# Altium PCB ESS_BOW_PCB.PcbDoc
Units mm, origin at the board's own origin, x right, y up, seen from the top; angles counter-clockwise.
Board outline 48.83 x 32.65 mm, 4 copper layers (Top Layer, GND, PWR, Bottom Layer), stack 0.603 mm thick; 47 components, 35 nets, 285 pads, 0 vias.
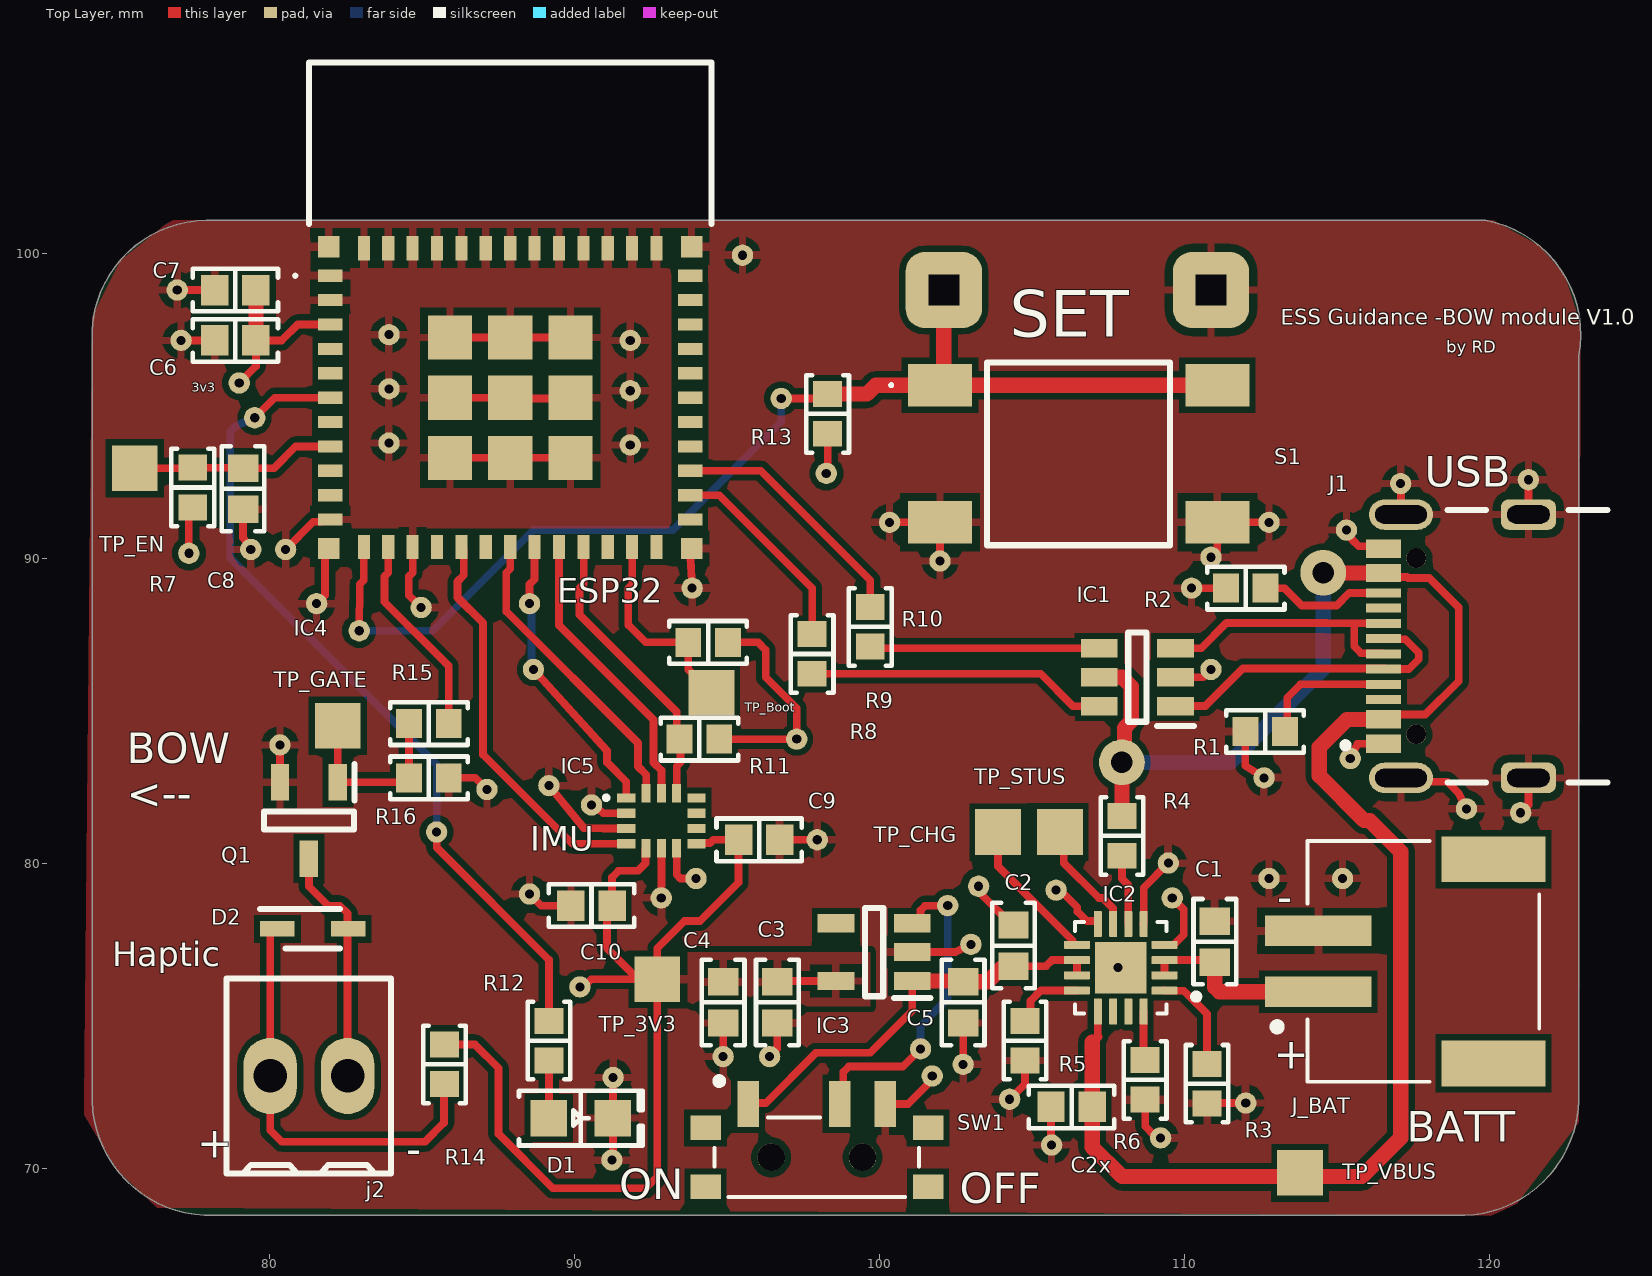
[diagram p0: Top Layer view]
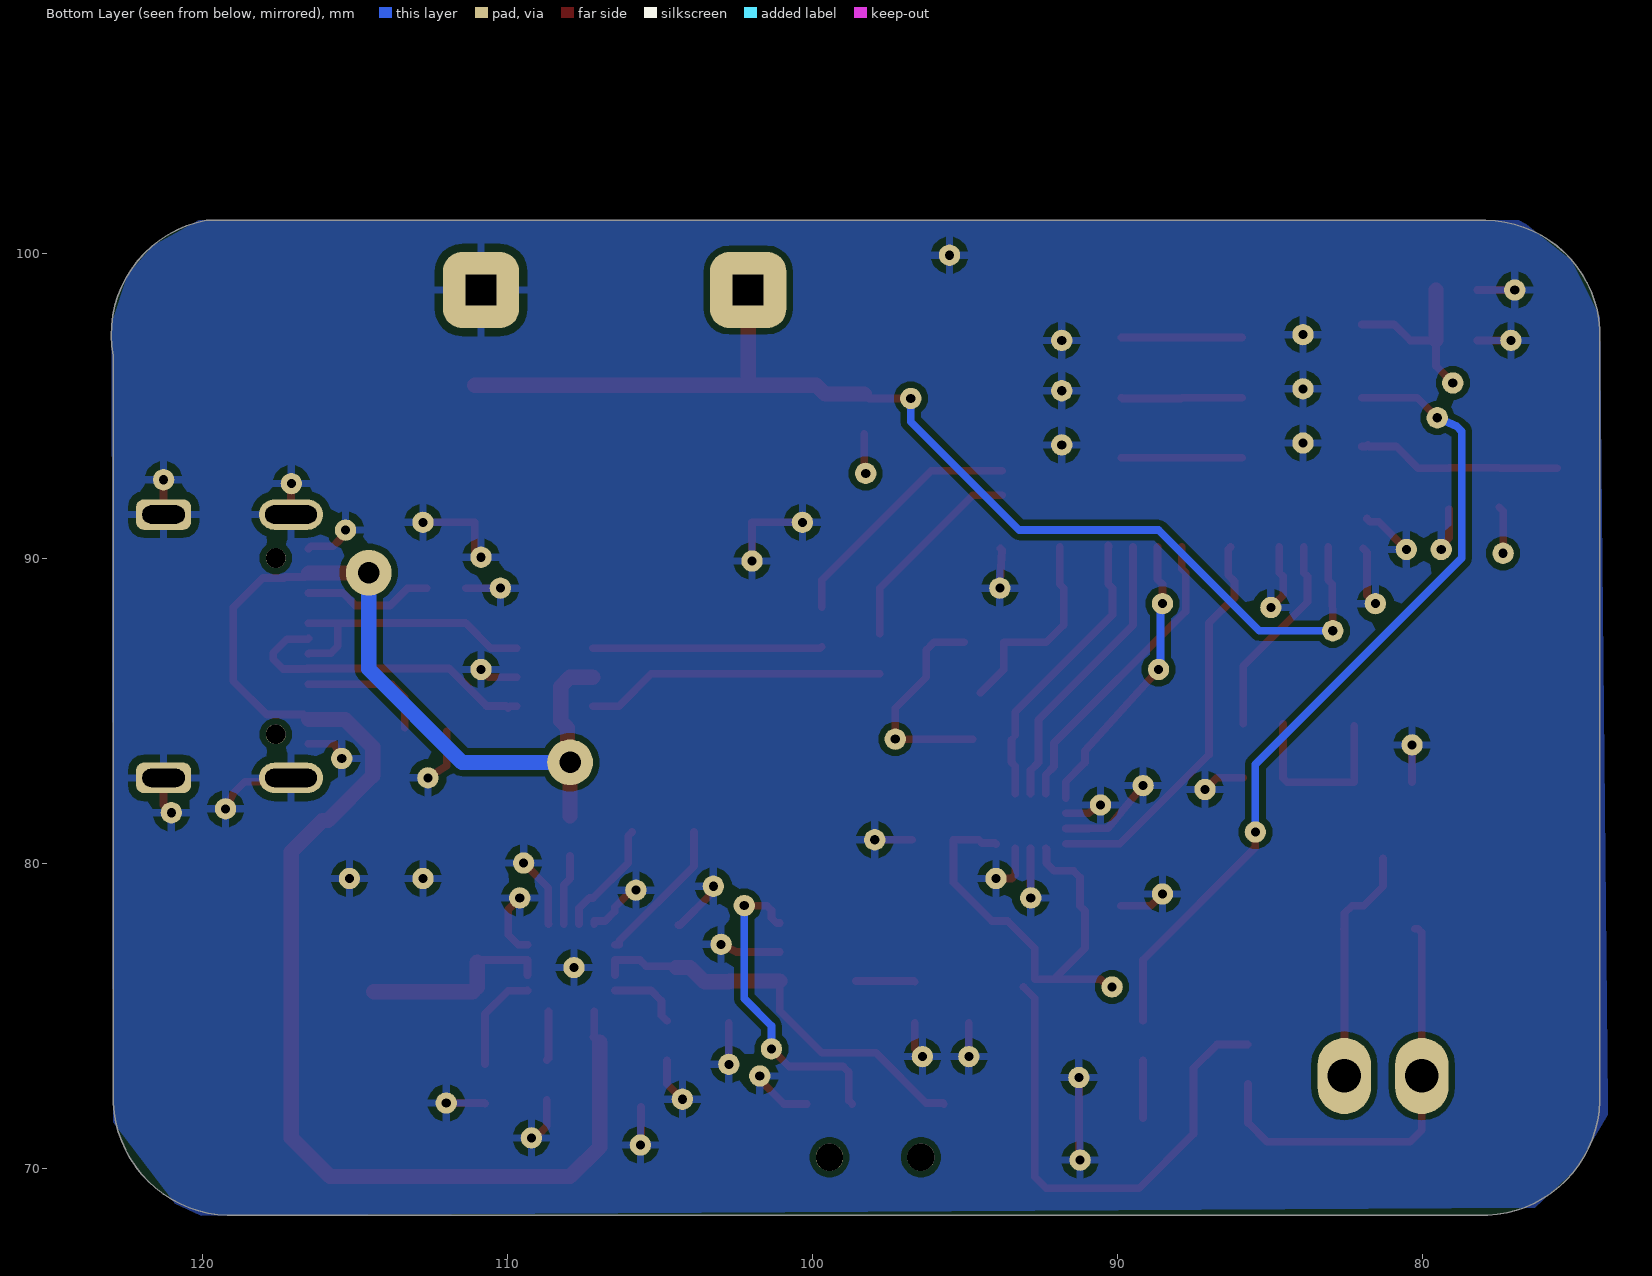
[diagram p1: Bottom Layer view, seen from below]
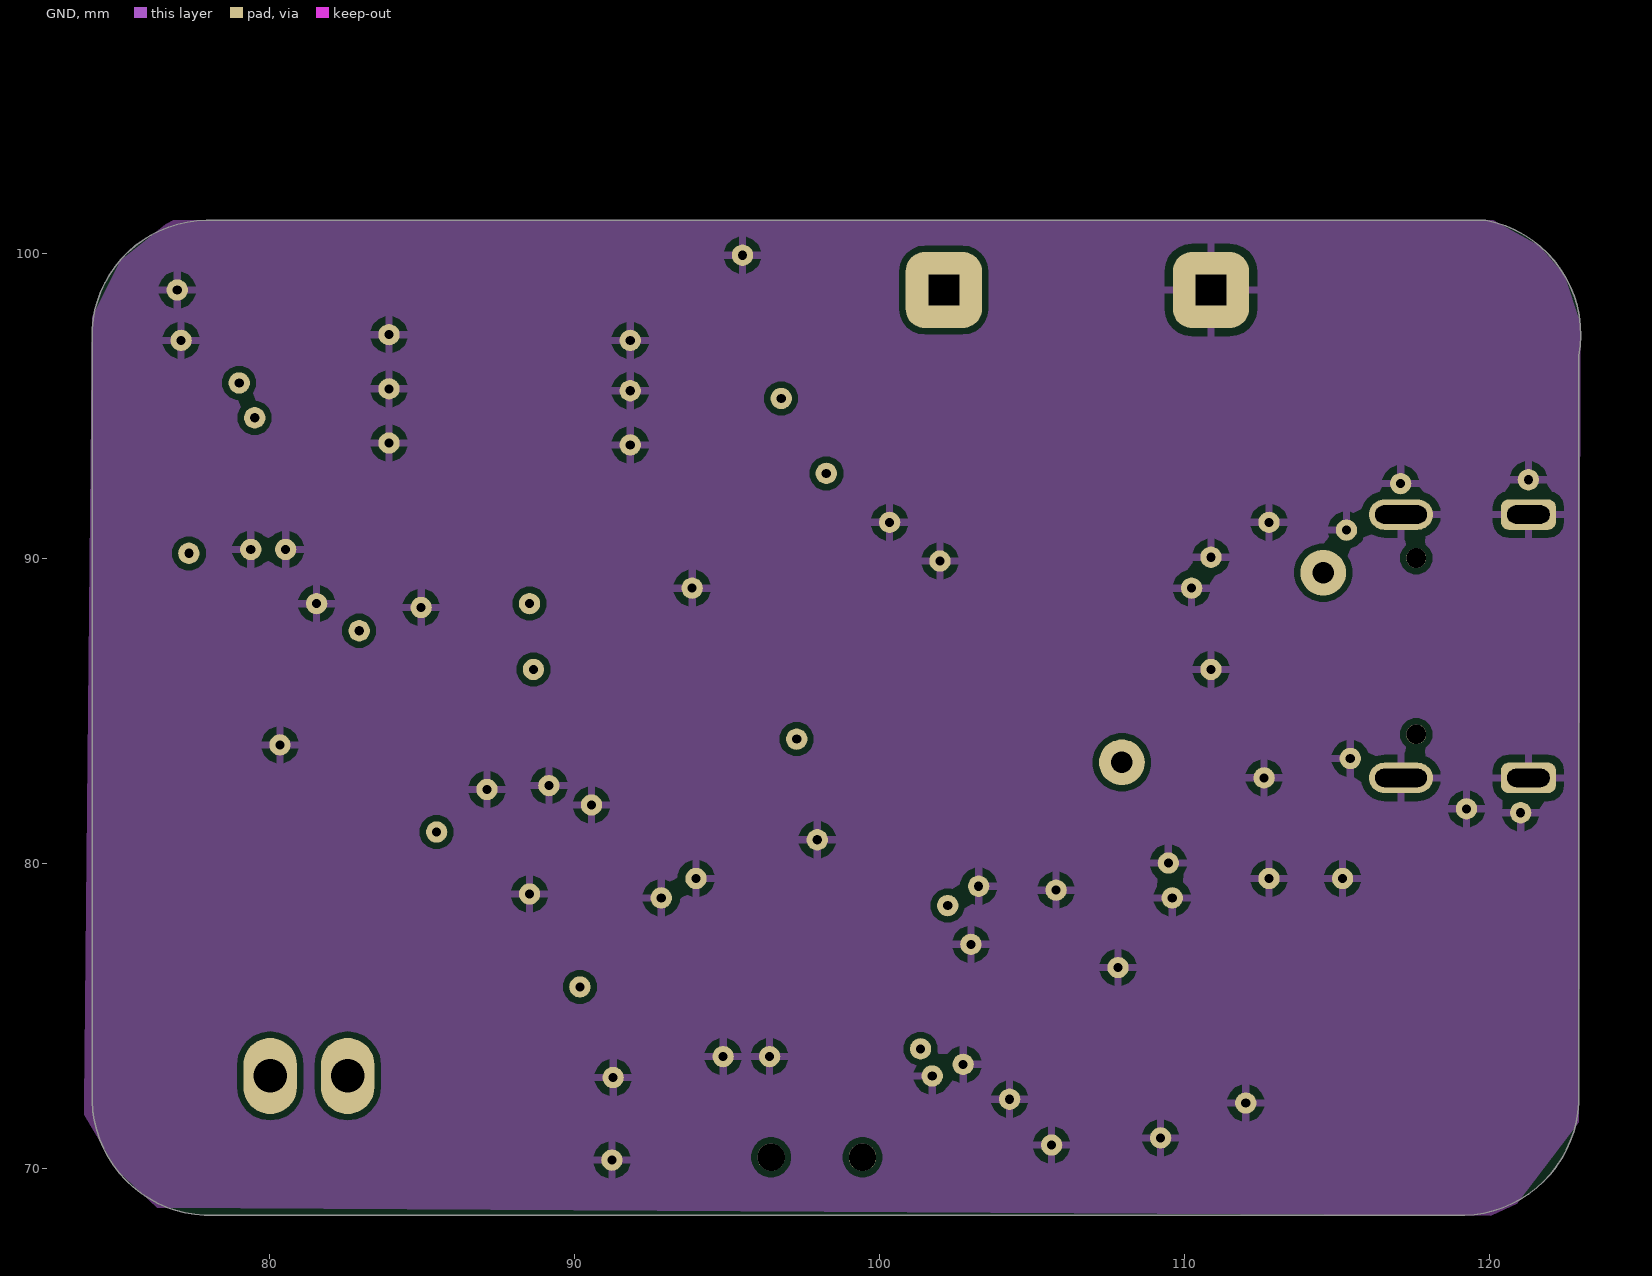
[diagram p2: GND]
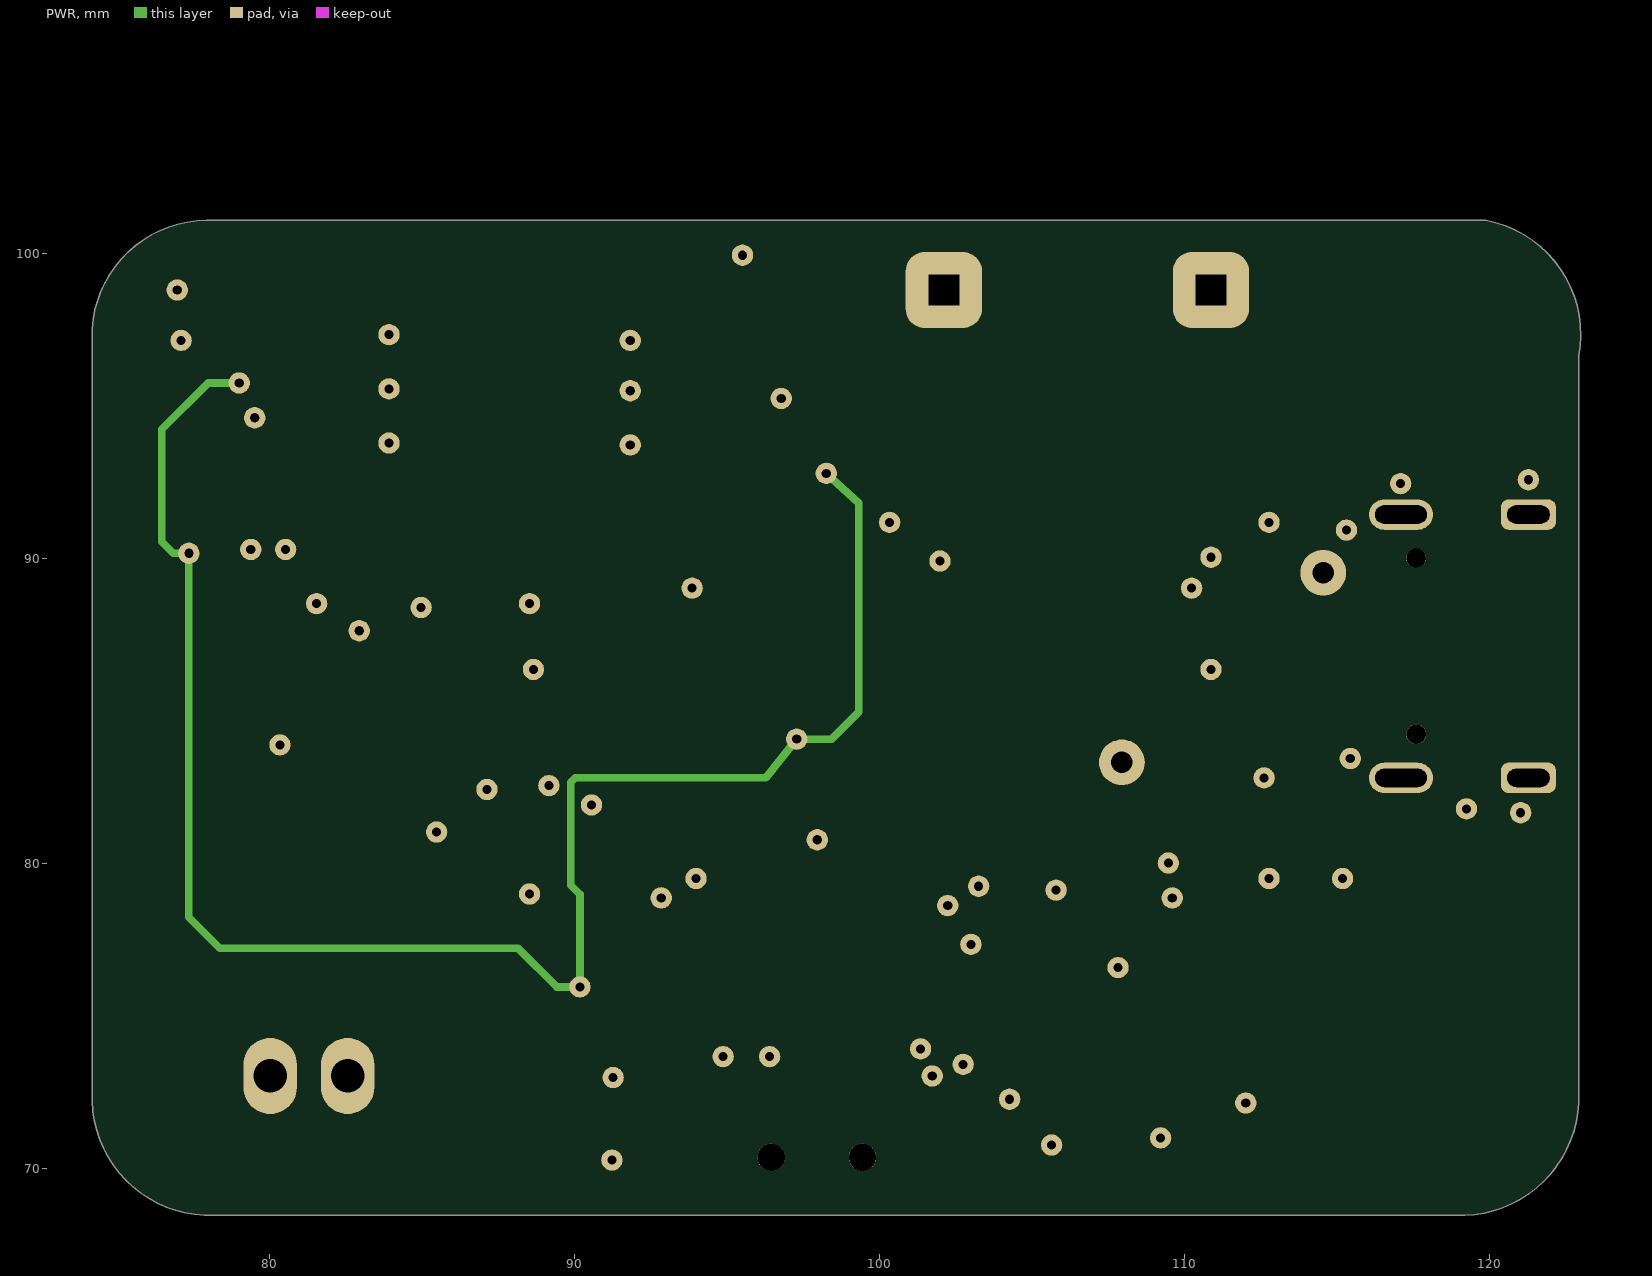
[diagram p3: PWR]
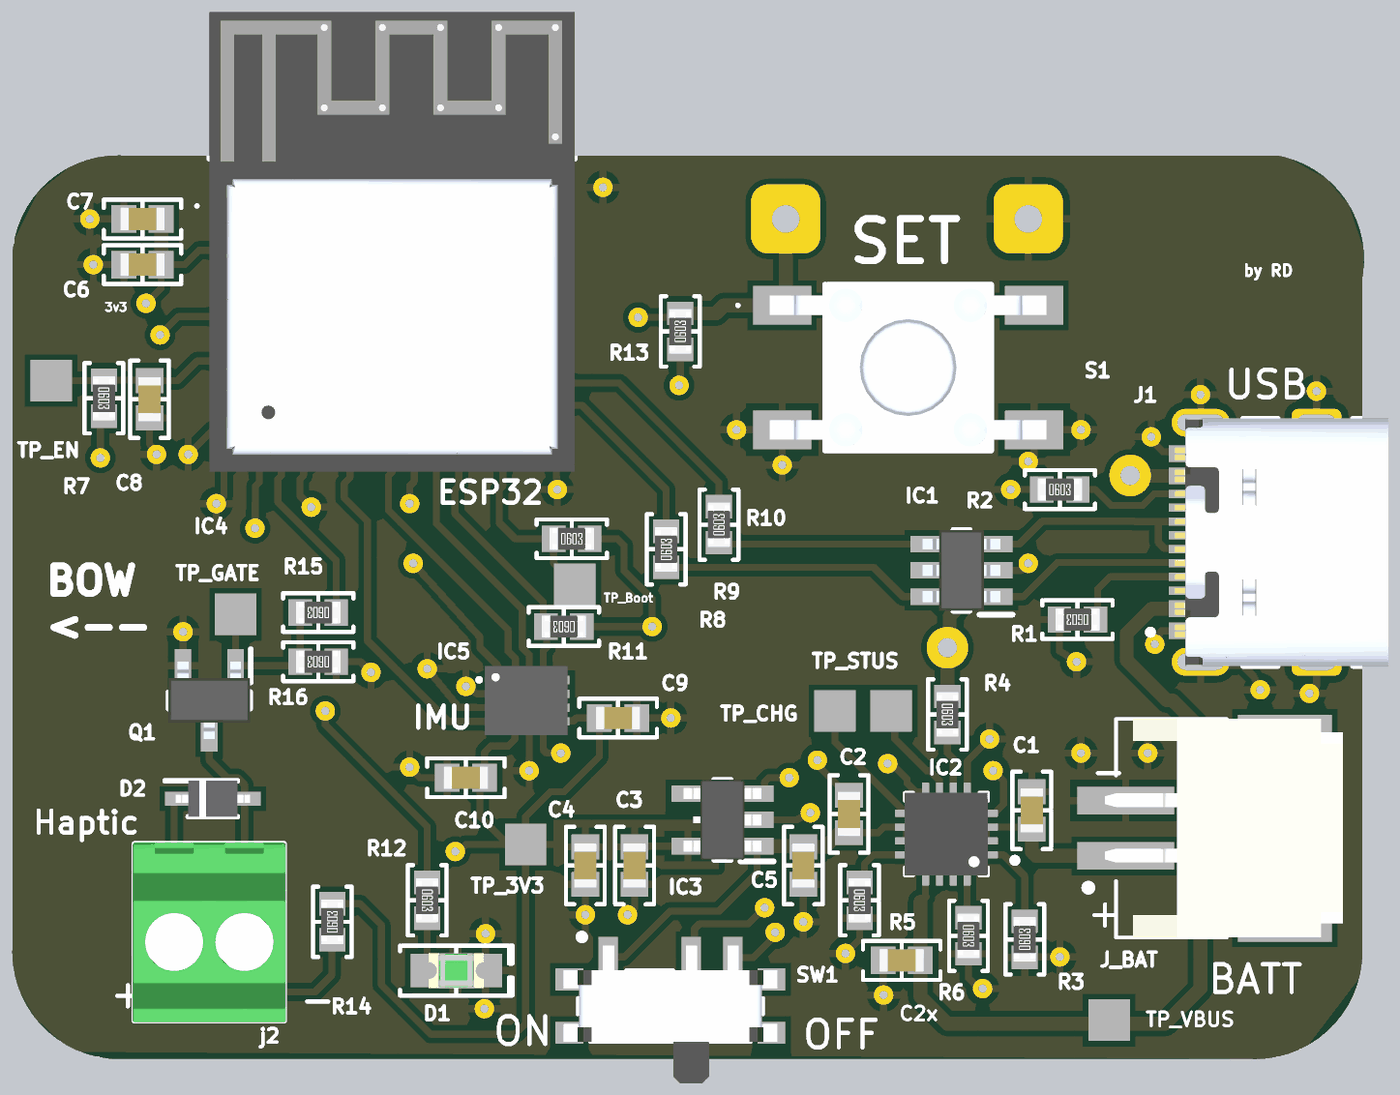
[diagram p4: 3D render of the assembled board from above, using the file's embedded part models]

## Layer stack, top to bottom
Top Solder: solder mask 0.0102, Solder Resist, Dk 3.5
Top Layer: signal copper 0.0356
Dielectric 2: prepreg 0.0711, PP-006, Dk 4.1
GND: signal copper 0.035
Dielectric 1: dielectric 0.32, FR-4, Dk 4.8
PWR: signal copper 0.035
Dielectric 3: prepreg 0.0711, PP-006, Dk 4.1
Bottom Layer: signal copper 0.0356
Bottom Solder: solder mask 0.0102, Solder Resist, Dk 3.5

## Board outline
77.851,68.453 cw(c78.041,72.326) 74.168,72.517 74.168,97.536 cw(c77.978,97.282) 78.232,101.092 119.888,101.092 cw(c119.189,97.346) 122.936,96.647 122.936,72.136 cw(c119.062,72.326) 118.872,68.453

## Design rules (kind name [scope] priority, off if disabled: settings)
Clearance Clearance_1 [All] p1: gap=0.2 ignorepadtopadclearanceinfootprint=TRUE
Clearance [All] p2: gap=0.2 ignorepadtopadclearanceinfootprint=TRUE
MinimumSolderMaskSliver [All] p1: minsoldermaskwidth=0.04
PolygonConnect [All] p1: connectstyle=Relief reliefconductorwidth=0.254 reliefentries=4 polygonreliefangle="90 Angle" airgapwidth=0.254
RoutingVias [All] p1: holewidth=0.3 width=0.7 viastyle="Through Hole" minholewidth=0.2 minwidth=0.4 maxholewidth=0.7 maxwidth=1.27
SilkToSilkClearance [All] p1: silktosilkclearance=0.05
SilkToSolderMaskClearance [IsPad] p1: minsilkscreentomaskgap=0.04 clearancetoexposedcopper=TRUE
SolderMaskExpansion [All] p1: expansion=0 istentingtop=FALSE
SupplyNets "Schematic Supply Nets" [InNet('GND')] p1: voltage=0.000
Width [All] p1: maxlimit=0.5 minlimit=0.254 preferedwidth=0.254
27 further rules are at their usual default settings.

## Classes and differential pairs
component class Bow_ESS_Schematic: C1 C2 C3 C4 C5 C6 C7 C8 C9 C10 D2 IC1 IC2 IC3 IC5 J1 j2 J_BAT Q1 R1 R2 R3 R4 R5 R6 R7 R8 R9 R10 R11 R12 R13 R14 R15 R16 S1 SW1 TP_3V3 TP_Boot TP_CHG TP_EN TP_GATE TP_STUS

## Components (designator, comment, footprint, x,y, rotation, side; value= is the part's Value field where it differs from the comment)
C1 "10 µF" "CAP 0603_1608" 110.998,77.43 r270 top
C2 "10 µF" "CAP 0603_1608" 104.394,77.303 r270 top
C2x "Comment" "CAP 0603_1608" 106.299,72.009 r180 top
C3 "0.1 µF" "CAP 0603_1608" 96.647,75.438 r90 top
C4 "10 µF" "CAP 0603_1608" 94.869,75.438 r90 top
C5 "4.7 µF" "CAP 0603_1608" 102.743,75.438 r270 top
C6 "0.1 µF" "CAP 0603_1608" 78.867,97.155 r0 top
C7 "10 µF" "CAP 0603_1608" 78.867,98.806 r0 top
C8 "1 µF" "CAP 0603_1608" 79.121,92.289 r90 top
C9 "0.1 µF" "CAP 0603_1608" 96.052,80.772 r180 top
C10 "0.1 µF" "CAP 0603_1608" 90.551,78.613 r180 top
D1 "Green" "LED 0805_2012 GREEN" 90.204,71.643 r0 top
D2 "BAT54WS-E3-08" SOD2713X115N 81.407,77.851 r0 top
IC1 "USBLC6-2SC6" SOT95P280X145-6N 108.458,86.106 r180 top
IC2 "BQ24074RGTR_1" QFN50P300X300X100-17N 107.912,76.577 r180 top
IC3 "TLV75533PDBVR" SOT95P280X145-5N 99.822,77.089 r180 top
IC4 "ESP32-C3-MINI-1-N4X" ESP32C3MINI1N4X 87.884,97.976 r0 top
IC5 "LSM6DSOXTR" LGA-14_1 92.844,81.395 r0 top
J1 "USB4105-GF-A-060" GCT_USB4105-GF-A-060 121.285,87.122 r90 top
j2 "282834-2" "TE 282834-2" 81.28,73.025 r180 top
J_BAT "S2B-PH-SM4-TB(LF)(SN)_1" JST_S2B-PH-SM4-TB(LF)(SN) 114.392,76.787 r90 top
Q1 "AO3400A" SOT95P280X125-3N 81.28,81.407 r270 top
R1 "5.1 kOhms" "RES 0603_1608" 112.649,84.328 r180 top
R2 "5.1 kOhms" "RES 0603_1608" 112.014,89.027 r0 top
R3 "10 kOhms" "RES 0603_1608" 110.744,72.771 r90 top
R4 "0 Ohms" "RES 0603_1608" 107.95,80.899 r270 top
R5 "3.3 kOhms" "RES 0603_1608" 104.775,74.183 r270 top
R6 "5.9 kOhms" "RES 0603_1608" 108.712,72.898 r270 top
R7 "10 kOhms" "RES 0603_1608" 77.47,92.329 r270 top
R8 "10 kOhms" "RES 0603_1608" 94.376,87.249 r0 top
R9 "22 Ohms" "RES 0603_1608" 97.79,86.868 r90 top
R10 "22 Ohms" "RES 0603_1608" 99.695,87.757 r90 top
R11 "10 kOhms" "RES 0603_1608" 94.092,84.074 r180 top
R12 "1 kOhms" "RES 0603_1608" 89.154,74.183 r270 top
R13 "10 kOhms" "RES 0603_1608" 98.298,94.742 r90 top
R14 "3.9 Ohms" "RES 0603_1608" 85.725,73.406 r90 top
R15 "100 Ohms" "RES 0603_1608" 85.217,84.582 r180 top
R16 "100 kOhms" "RES 0603_1608" 85.217,82.804 r180 top
S1 "TS04-66-43-BK-100-SMT" TS046643BK100SMT 106.531,93.436 r0 top
SW1 "PCM12SMTR" SW_PCM12SMTR 97.941,70.358 r0 top
TP_3V3 "" Test_Pad 93.599,76.327 r90 top
TP_Boot "" Test_Pad 95.377,85.725 r90 top
TP_CHG "" Test_Pad 104.775,81.153 r90 top
TP_EN "Test Point" Test_Pad 76.454,93.091 r90 top
TP_GATE "" Test_Pad 83.119,84.643 r90 top
TP_STUS "" Test_Pad 106.807,81.153 r90 top
TP_VBUS "Comment" Test_Pad 113.919,68.961 r0 top

## Footprints (in the part's own frame and the unit in brackets; to place one, negate y for a bottom-side part, rotate by r counter-clockwise, add the part's x,y. Pads: shape width x height; smd on the part's side, far side on the other; paste and mask are expansions set on the pad)
"CAP 0603_1608" [mm] "Chip Capacitor, 2-Leads, Body 1.60x0.80mm, IPC Medium Density"
  rect 0.9x1 smd: 1(-0.675,0) 2(0.675,0)
  silkscreen extent -1.4,-0.7 1.4,0.7, body extent -0.8,-0.41 0.8,0.41, height 0.82
ESP32C3MINI1N4X [mm]
  rect 0.8x0.4 smd: 1(-5.9,1.3) 2(-5.9,0.5) 3(-5.9,-0.3) 4(-5.9,-1.1) 5(-5.9,-1.9) 6(-5.9,-2.7) 7(-5.9,-3.5) 8(-5.9,-4.3) 9(-5.9,-5.1) 10(-5.9,-5.9) 11(-5.9,-6.7) 25(5.9,-6.7) 26(5.9,-5.9) 27(5.9,-5.1) 28(5.9,-4.3) 29(5.9,-3.5) 30(5.9,-2.7) 31(5.9,-1.9) 32(5.9,-1.1) 33(5.9,-0.3) 34(5.9,0.5) 35(5.9,1.3)
  rect 0.4x0.8 smd: 12(-4.8,-7.6) 13(-4,-7.6) 14(-3.2,-7.6) 15(-2.4,-7.6) 16(-1.6,-7.6) 17(-0.8,-7.6) 18(0,-7.6) 19(0.8,-7.6) 20(1.6,-7.6) 21(2.4,-7.6) 22(3.2,-7.6) 23(4,-7.6) 24(4.8,-7.6) 36(4.8,2.2) 37(4,2.2) 38(3.2,2.2) 39(2.4,2.2) 40(1.6,2.2) 41(0.8,2.2) 42(0,2.2) 43(-0.8,2.2) 44(-1.6,2.2) 45(-2.4,2.2) 46(-3.2,2.2) 47(-4,2.2) 48(-4.8,2.2)
  rect 1.45x1.45 smd: 49(0,-2.7) 54(-1.975,-0.725) 55(-1.975,-2.7) 56(-1.975,-4.675) 57(0,-4.675) 58(1.975,-4.675) 59(1.975,-2.7) 60(1.975,-0.725) 61(0,-0.725)
  rect 0.7x0.7 smd: 50(5.95,2.25) 51(5.95,-7.65) 52(-5.95,-7.65) 53(-5.95,2.25)
  silkscreen extent -7.1,1.25 6.6,8.3, body extent -6.6,-8.3 6.6,8.3, height 2.55
GCT_USB4105-GF-A-060 [mm]
  rect 0.6x1.15 smd: A1_B12(-3.2,4.755) A4_B9(-2.4,4.755) B1_A12(3.2,4.755) B4_A9(2.4,4.755)
  rect 0.3x1.15 smd: A5(-1.25,4.755) A6(-0.25,4.755) A7(0.25,4.755) A8(1.25,4.755) B5(1.75,4.755) B6(0.75,4.755) B7(-0.75,4.755) B8(-1.75,4.755)
  oval 1x2.1 hole 0.6 slot 1.7 at 90 deg: SH1(-4.32,4.18) SH2(4.32,4.18)
  rrect50% 1x1.8 hole 0.6 slot 1.4 at 90 deg: SH3(-4.32,0) SH4(4.32,0)
  round 0.65 hole 0.65 unplated: ""(-2.89,3.68) ""(2.89,3.68)
  silkscreen extent -4.47,-2.6 4.47,6.1, body extent -4.47,-2.6 4.47,5.11, height 3.31
JST_S2B-PH-SM4-TB(LF)(SN) [mm]
  rect 1x3.5 smd: 1(-1,0) 2(1,0)
  rect 1.5x3.4 smd: S1(-3.35,-5.75) S2(3.35,-5.75)
  silkscreen extent -3.95,-7.25 3.95,1.45, body extent -3.94,-7.86 3.96,0.74, height 5.5
"LED 0805_2012 GREEN" [mm] "Chip Diode, 2-Leads, Body 2.00x1.25mm, IPC Medium Density"
  rect 1.2x1.2 smd: 1(-1.05,0) 2(1.05,0)
  silkscreen extent -2.03,-0.9 2.03,0.9, body extent -1,-0.62 1,0.63, height 0.9
LGA-14_1 [mm]
  rect 0.6x0.3 smd: 1(-1.15,0.75) 2(-1.15,0.25) 3(-1.15,-0.25) 4(-1.15,-0.75) 8(1.15,-0.75) 9(1.15,-0.25) 10(1.15,0.25) 11(1.15,0.75)
  rect 0.3x0.6 smd: 5(-0.5,-0.9) 6(0,-0.9) 7(0.5,-0.9) 12(0.5,0.9) 13(0,0.9) 14(-0.5,0.9)
  silkscreen extent -1.83,0.74 -1.8,0.77, body extent -1.62,-1.25 1.38,1.25, height 0.86
QFN50P300X300X100-17N [mm]
  rrect25% 0.86x0.26 smd: 1(-1.435,0.75) 2(-1.435,0.25) 3(-1.435,-0.25) 4(-1.435,-0.75) 9(1.435,-0.75) 10(1.435,-0.25) 11(1.435,0.25) 12(1.435,0.75)
  rrect25% 0.26x0.86 smd: 5(-0.75,-1.435) 6(-0.25,-1.435) 7(0.25,-1.435) 8(0.75,-1.435) 13(0.75,1.435) 14(0.25,1.435) 15(-0.25,1.435) 16(-0.75,1.435)
  rect 1.68x1.68 smd paste-0.31: 17(0,0)
  silkscreen extent -2.57,-1.5 1.5,1.5, body extent -1.5,-1.5 1.5,1.5, height 1
"RES 0603_1608" [mm] "Chip Resistor, 2-Leads, Body 1.60x0.80mm, IPC Medium Density"
  rect 0.85x0.95 smd: 1(-0.65,0) 2(0.65,0)
  silkscreen extent -1.27,-0.7 1.27,0.7, body extent -0.8,-0.4 0.8,0.4, height 0.45
SOD2713X115N [mm]
  rect 1.125x0.5 smd: 1(-1.162,0) 2(1.162,0)
  silkscreen extent -1.73,-0.65 0.89,0.65, body extent -1.34,-0.65 1.34,0.65, height 0.95
SOT95P280X125-3N [mm]
  rect 1.2x0.6 smd: 1(-1.25,0.95) 2(-1.25,-0.95) 3(1.25,0)
  silkscreen extent -1.85,-1.48 0.3,1.5, body extent -1.4,-1.48 1.4,1.48, height 1.25
SOT95P280X145-5N [mm]
  rect 1.2x0.6 smd: 1(-1.25,0.95) 2(-1.25,0) 3(-1.25,-0.95) 4(1.25,-0.95) 5(1.25,0.95)
  silkscreen extent -1.85,-1.45 0.3,1.5, body extent -1.4,-1.45 1.4,1.45, height 1.2
SOT95P280X145-6N [mm]
  rect 1.2x0.6 smd: 1(-1.25,0.95) 2(-1.25,0) 3(-1.25,-0.95) 4(1.25,-0.95) 5(1.25,0) 6(1.25,0.95)
  silkscreen extent -1.85,-1.46 0.3,1.6, body extent -1.4,-1.46 1.4,1.46, height 1.45
SW_PCM12SMTR [mm]
  rect 0.7x1.5 smd: 1(-2.25,1.75) 2(0.75,1.75) 3(2.25,1.75)
  rect 1x0.8 smd: S1(-3.65,0.965) S2(-3.65,-0.965) S3(3.65,-0.965) S4(3.65,0.965)
  round 0.9 hole 0.9 unplated: ""(-1.5,0) ""(1.5,0)
  silkscreen extent -3.35,-1.3 3.35,2.6, body extent -3.86,-2.79 3.86,2.18, height 1.4
"TE 282834-2" [mm]
  oval 1.75x2.5 hole 1.1: 1(-1.27,0) 2(1.27,0)
  silkscreen extent -2.7,-3.2 2.7,3.2, body extent -2.77,-3.25 2.77,3.25, height 10
Test_Pad [mm] "Test Pad 1.5mm_Rect"
  rect 1.5x1.5 smd: 3(-0.127,0.889) 4(-0.127,0.889)
TS046643BK100SMT [mm]
  rect 2.1x1.4 smd: 1(-4.55,2.25) 2(-4.55,-2.25) 3(4.55,2.25) 4(4.55,-2.25)
  silkscreen extent -6.2,-3 3,3, body extent -5,-3 5,3, height 4.4

## Part data
C1 C2 C4: library part GRM188R60J106ME47D, "CAP CER 10UF 6.3V X5R 0603", Device Package="0603 (1608 Metric)", manufacturer="Murata Electronics", Operating Temperature="-55°C ~ 85°C", Supplier Part Number 1=490-3896-1-ND, Temperature Coefficient=X5R, Tolerance=±20%, Voltage - Rated=6.3V, Applications="General Purpose", Capacitance="10 µF", componentlink1description=Datasheet, componentlink1url=https://www.murata.com/~/media/webrenewal/support/library/catalog/products/capacitor/mlcc/c02e.ashx?la=en-us, componentlink2description="DigiKey Link", componentlink2url=https://www.digikey.com/en/products/detail/murata-electronics/GRM188R60J106ME47D/965910, lastupdated="06/04/2026 19:23:52", Lifecycle Status=Active, Minimum Order=1, Mounting Type="Surface Mount, MLCC", Package / Case="0603 (1608 Metric)", packaging=TapeAndReel, Part Number=GRM188R60J106ME47D, Part Status=Active, partid=2351, price=0.01, series=GRM, Size / Dimension="0.063\" L x 0.031\" W (1.60mm x 0.80mm)", Supplier 1=DigiKey, Thickness (Max)="0.035\" (0.90mm)"
C2x: library part GRM188R61E475KE11D
C3 C6 C9 C10: library part CL10E104KC8VPNC, "CAP CER 100NF 100V X8L 0603", Device Package="0603 (1608 Metric)", manufacturer="Samsung Electro-Mechanics", Operating Temperature="-55°C ~ 150°C", Ratings=AEC-Q200, Supplier Part Number 1=1276-CL10E104KC8VPNCCT-ND, Temperature Coefficient=X8L, Tolerance=±10%, Voltage - Rated=100V, Applications=Automotive, Capacitance="0.1 µF", componentlink1description=Datasheet, componentlink1url=https://mm.digikey.com/Volume0/opasdata/d220001/medias/docus/5458/CL10E104KC8VPNC_Spec.pdf, componentlink2description="DigiKey Link", componentlink2url=https://www.digikey.com/en/products/detail/samsung-electro-mechanics/CL10E104KC8VPNC/20498486, Features="General Purpose", lastupdated="06/04/2026 19:18:46", Lifecycle Status=Active, Minimum Order=1, Mounting Type="Surface Mount, MLCC, Epoxy", Package / Case="0603 (1608 Metric)", packaging=TapeAndReel, Part Number=CL10E104KC8VPNC, partid=68845, price=0.04, series=CL, Size / Dimension="0.063\" L x 0.031\" W (1.60mm x 0.80mm)", Supplier 1=DigiKey, Thickness (Max)="0.035\" (0.88mm)"
C5: library part GRM188R61E475KE11D, "CAP CER 4.7UF 25V X5R 0603", Device Package="0603 (1608 Metric)", manufacturer="Murata Electronics", Operating Temperature="-55°C ~ 85°C", Supplier Part Number 1=490-7203-1-ND, Temperature Coefficient=X5R, Tolerance=±10%, Voltage - Rated=25V, Applications="General Purpose", Capacitance="4.7 µF", componentlink1description=Datasheet, componentlink1url=https://www.murata.com/~/media/webrenewal/support/library/catalog/products/capacitor/mlcc/c02e.ashx?la=en-us, componentlink2description="DigiKey Link", componentlink2url=https://www.digikey.com/en/products/detail/murata-electronics/GRM188R61E475KE11D/3900465, lastupdated="06/04/2026 19:23:52", Lifecycle Status=Active, Minimum Order=1, Mounting Type="Surface Mount, MLCC", Package / Case="0603 (1608 Metric)", packaging=TapeAndReel, Part Number=GRM188R61E475KE11D, Part Status=Active, partid=2387, price=0.03, series=GRM, Size / Dimension="0.063\" L x 0.031\" W (1.60mm x 0.80mm)", Supplier 1=DigiKey, Thickness (Max)="0.037\" (0.95mm)"
C7: library part GRM188R60G106ME47D, "CAP CER 10UF 4V X5R 0603", Device Package="0603 (1608 Metric)", manufacturer="Murata Electronics", Operating Temperature="-55°C ~ 85°C", Supplier Part Number 1=490-3298-1-ND, Temperature Coefficient=X5R, Tolerance=±20%, Voltage - Rated=4V, Applications="General Purpose", Capacitance="10 µF", componentlink1description=Datasheet, componentlink1url=https://www.murata.com/~/media/webrenewal/support/library/catalog/products/capacitor/mlcc/c02e.ashx?la=en-us, componentlink2description="DigiKey Link", componentlink2url=https://www.digikey.com/en/products/detail/murata-electronics/GRM188R60G106ME47D/702562, lastupdated="06/04/2026 19:23:52", Lifecycle Status=Active, Minimum Order=1, Mounting Type="Surface Mount, MLCC", Package / Case="0603 (1608 Metric)", packaging=TapeAndReel, Part Number=GRM188R60G106ME47D, Part Status=Active, partid=2393, price=0.01, series=GRM, Size / Dimension="0.063\" L x 0.031\" W (1.60mm x 0.80mm)", Supplier 1=DigiKey, Thickness (Max)="0.035\" (0.90mm)"
C8: library part C0603C105K4RACAUTO, "CAP CER 1UF 16V X7R 0603", Device Package="0603 (1608 Metric)", manufacturer=KEMET, Operating Temperature="-55°C ~ 125°C", Ratings=AEC-Q200, Supplier Part Number 1=399-17704-1-ND, Temperature Coefficient=X7R, Tolerance=±10%, Voltage - Rated=16V, Applications="Automotive, Bypass, Decoupling", Capacitance="1 µF", componentlink1description=Datasheet, componentlink1url=https://api.kemet.com/component-edge/download/datasheet/C0603C105K4RACAUTO.pdf, componentlink2description="DigiKey Link", componentlink2url=https://www.digikey.com/en/products/detail/kemet/C0603C105K4RACAUTO/8635831, lastupdated="06/04/2026 19:23:53", Lifecycle Status=Active, Minimum Order=1, Mounting Type="Surface Mount, MLCC", Package / Case="0603 (1608 Metric)", packaging=TapeAndReel, Part Number=C0603C105K4RACAUTO, Part Status=Active, partid=2179, price=0.02, series="SMD Auto X7R", Size / Dimension="0.063\" L x 0.031\" W (1.60mm x 0.80mm)", Supplier 1=DigiKey, Thickness (Max)="0.037\" (0.95mm)"
D1: library part QTLP630C4TR, "LED GREEN CLEAR 0805 SMD", Current - Test=20mA, Device Package="0805 (2012 Metric)", Lens Color=Colorless, manufacturer="Everlight Electronics Co Ltd", Millicandela Rating=10mcd, Supplier Device Package=0805, Supplier Part Number 1=1080-1411-1-ND, Voltage - Forward (Vf) (Typ)=2.1V, Color=Green, componentlink1description=Datasheet, componentlink1url=//media.digikey.com/PDF/Data%20Sheets/Everlight%20PDFs/QTLP630-2.pdf, componentlink2description="DigiKey Link", componentlink2url=https://www.digikey.com/en/products/detail/everlight-electronics-co-ltd/QTLP630C4TR/2675902, Configuration=Standard, Height (Max)=1.20mm, lastupdated="05/04/2026 20:39:04", Lens Size="1.40mm x 1.25mm", Lens Style="Rectangle with Flat Top", Lens Transparency=Clear, Lifecycle Status=Active, Minimum Order=1, Mounting Type="Surface Mount", Package / Case="0805 (2012 Metric)", packaging=TapeAndReel, Part Number=QTLP630C4TR, Part Status=Active, partid=240, price=0.05, series=-, Size / Dimension="2.00mm L x 1.25mm W", Supplier 1=DigiKey, Viewing Angle=140°, Wavelength - Dominant=570nm, Wavelength - Peak=565nm
D2: "Diode", Manufacturer_Name=Vishay, Mouser Part Number=78-BAT54WS-E3-08, Arrow Part Number=BAT54WS-E3-08, Arrow Price/Stock=https://www.arrow.com/en/products/bat54ws-e3-08/vishay.html?utm_currency=USD&region=nac, Datasheet Link=https://componentsearchengine.com/Datasheets/2/BAT54WS-E3-08.pdf, Height=1.15mm, Manufacturer_Part_Number=BAT54WS-E3-08, Mouser Price/Stock=https://www.mouser.co.uk/ProductDetail/Vishay-Semiconductors/BAT54WS-E3-08?qs=KP8Io%2FXyE5Rw40UGWRT8IQ%3D%3D
IC1: "Integrated Circuit", Manufacturer_Name=STMicroelectronics, Mouser Part Number=511-USBLC6-2SC6, Arrow Part Number=USBLC6-2SC6, Arrow Price/Stock=https://www.arrow.com/en/products/usblc6-2sc6/stmicroelectronics.html?utm_currency=USD&region=nac, Datasheet Link=https://www.st.com/resource/en/datasheet/usblc6-2.pdf, Height=1.45mm, Manufacturer_Part_Number=USBLC6-2SC6, Mouser Price/Stock=https://www.mouser.co.uk/ProductDetail/STMicroelectronics/USBLC6-2SC6?qs=po45yt2pPpu%2FhNIlwQdTlg%3D%3D
IC2: "Standalone 1-cell 1.5-A linear battery charger, Power Path, 4.2-V VBAT, 10.5-V OVP and 4.4-V VOUT", Package="VQFN-16 Texas Instruments", Check_prices=https://www.snapeda.com/parts/BQ24074RGTR/Texas+Instruments/view-part/?ref=eda, MF="Texas Instruments", MP=BQ24074RGTR, SnapEDA_Link=https://www.snapeda.com/parts/BQ24074RGTR/Texas+Instruments/view-part/?ref=snap
IC3: "Integrated Circuit", Manufacturer_Name="Texas Instruments", Mouser Part Number=595-TLV75533PDBVR, Arrow Part Number=TLV75533PDBVR, Arrow Price/Stock=https://www.arrow.com/en/products/tlv75533pdbvr/texas-instruments?utm_currency=USD&region=nac, Datasheet Link=http://www.ti.com/lit/gpn/tlv755p, Height=1.45mm, Manufacturer_Part_Number=TLV75533PDBVR, Mouser Price/Stock=https://www.mouser.co.uk/ProductDetail/Texas-Instruments/TLV75533PDBVR?qs=55YtniHzbhAKEwqeO2xJXQ%3D%3D
IC4: "Integrated Circuit", Manufacturer_Name="Espressif Systems", Datasheet Link=https://www.digikey.com/en/products/detail/espressif-systems/ESP32-C3-MINI-1-N4X/27525554, Height=2.55mm, Manufacturer_Part_Number=ESP32-C3-MINI-1-N4X
IC5: "Accelerometer", Manufacturer_Name=STMicroelectronics, Mouser Part Number=511-LSM6DSOXTR, Arrow Part Number=LSM6DSOXTR, Arrow Price/Stock=https://www.arrow.com/en/products/lsm6dsoxtr/stmicroelectronics.html?utm_currency=USD&region=europe, Datasheet Link=https://www.st.com/resource/en/datasheet/lsm6dsox.pdf, Manufacturer_Part_Number=LSM6DSOXTR, Mouser Price/Stock=https://www.mouser.co.uk/ProductDetail/STMicroelectronics/LSM6DSOXTR?qs=l7cgNqFNU1i9dcjzItLpVQ%3D%3D
J1: "USB-C (USB TYPE-C) USB 2.0 Receptacle Connector 24 (16+8 Dummy) Position Surface Mount, Right Angle; Through Hole", Package=None, Check_prices=https://www.snapeda.com/parts/USB4105GFA060/Global+Connector+Technology/view-part/?ref=eda, MF="Global Connector Technology", MP=USB4105GFA060, SnapEDA_Link=https://www.snapeda.com/parts/USB4105GFA060/Global+Connector+Technology/view-part/?ref=snap
j2: "TERM BLK 2P SIDE ENT 2.54MM PCB", Color=Green, Current=10A, manufacturer="TE Connectivity AMP Connectors", Supplier Part Number 1=A98333-ND, Voltage=150V, componentlink1description=Datasheet, componentlink1url=https://www.te.com/commerce/DocumentDelivery/DDEController?Action=srchrtrv&DocNm=282834&DocType=Customer+Drawing&DocLang=English, componentlink2description="DigiKey Link", componentlink2url=http://digikey.com/product-detail/en/te-connectivity-amp-connectors/282834-2/A98333-ND/1150135, lastupdated="15/01/2020 4:15:38", Lifecycle Status=Active, Mating Orientation="Horizontal with Board", Minimum Order=1, Mounting Type="Through Hole", Number of Levels=1, packaging=Bulk, Part Number=282834-2, Part Status=Active, Pitch="0.100\" (2.54mm)", Positions Per Level=2, price=0.88, series=Buchanan, Supplier 1=DigiKey, Wire Gauge="16-30 AWG", Wire Termination="Screw - Rising Cage Clamp"
J_BAT: "Connector Header Surface Mount, Right Angle 2 position 0.079 (2.00mm)", Package=None, Check_prices=https://www.snapeda.com/parts/S2B-PH-SM4-TB(LF)(SN)/JST+Sales+America+Inc./view-part/?ref=eda, Digi-Key_Part_Number=455-1749-2-ND, MF="JST Sales", MP=S2B-PH-SM4-TB(LF)(SN), Purchase-URL=https://pricing.snapeda.com/search/part/S2B-PH-SM4-TB(LF)(SN)/?ref=eda, SnapEDA_Link=https://www.snapeda.com/parts/S2B-PH-SM4-TB(LF)(SN)/JST+Sales+America+Inc./view-part/?ref=snap
Q1: "MOSFET (N-Channel)", Manufacturer_Name="Alpha & Omega Semiconductors", Arrow Part Number=AO3400A, Arrow Price/Stock=https://www.arrow.com/en/products/ao3400a/alpha-and-omega-semiconductor?utm_currency=USD&region=nac, Datasheet Link=http://aosmd.com/res/data_sheets/AO3400A.pdf, Height=1.25mm, Manufacturer_Part_Number=AO3400A
R1 R2: library part RMCF0603JG5K10, "RES 5.1K OHM 5% 1/10W 0603", Device Package="0603 (1608 Metric)", manufacturer="Stackpole Electronics Inc", Operating Temperature="-55°C ~ 155°C", Power (Watts)="0.1W, 1/10W", Ratings=AEC-Q200, Supplier Device Package=0603, Supplier Part Number 1=738-RMCF0603JG5K10CT-ND, Temperature Coefficient=±200ppm/°C, Tolerance=±5%, componentlink1description=Datasheet, componentlink1url=https://www.seielect.com/catalog/sei-packaging.pdf, componentlink2description="DigiKey Link", componentlink2url=https://www.digikey.com/en/products/detail/stackpole-electronics-inc/RMCF0603JG5K10/1712287, Composition="Thick Film", Features="Automotive AEC-Q200", Height - Seated (Max)="0.022\" (0.55mm)", lastupdated="09/02/2024 20:43:35", Lifecycle Status=Active, Minimum Order=1, Number of Terminations=2, Package / Case="0603 (1608 Metric)", packaging=CutTape, Part Number=RMCF0603JG5K10, Part Status=Active, partid=5180, price=0.01, Resistance="5.1 kOhms", series=RMCF, Size / Dimension="0.061\" L x 0.031\" W (1.55mm x 0.80mm)", Supplier 1=DigiKey
R3 R7 R8 R11 R13: library part RNCS0603BKE10K0, "RES 10K OHM 0.1% 1/16W 0603", Device Package="0603 (1608 Metric)", manufacturer="Stackpole Electronics Inc", Operating Temperature="-55°C ~ 155°C", Power (Watts)="0.063W, 1/16W", Ratings=AEC-Q200, Supplier Device Package=0603, Supplier Part Number 1=RNCS0603BKE10K0CT-ND, Temperature Coefficient=±25ppm/°C, Tolerance=±0.1%, componentlink1description=Datasheet, componentlink1url=https://www.seielect.com/catalog/sei-rncs_rnch.pdf, componentlink2description="DigiKey Link", componentlink2url=https://www.digikey.com/en/products/detail/stackpole-electronics-inc/RNCS0603BKE10K0/1708836, Composition="Thin Film", Features="Anti-Corrosive, Automotive AEC-Q200, Moisture Resistant", Height - Seated (Max)="0.022\" (0.55mm)", lastupdated="09/02/2024 20:43:37", Lifecycle Status=Active, Minimum Order=1, Number of Terminations=2, Package / Case="0603 (1608 Metric)", packaging=TapeAndReel, Part Number=RNCS0603BKE10K0, Part Status=Active, partid=4838, price=0.06, Resistance="10 kOhms", series=RNCS, Size / Dimension="0.061\" L x 0.031\" W (1.55mm x 0.80mm)", Supplier 1=DigiKey
R4: library part RCS06030000Z0EC, "RCS0603 0R0 ET6 E3", Device Package="0603 (1608 Metric)", manufacturer="Vishay Dale", Operating Temperature="-55°C ~ 155°C", Power (Watts)="0.25W, 1/4W", Ratings=AEC-Q200, Supplier Device Package=0603, Supplier Part Number 1=541-10557-1-ND, Tolerance=Jumper, componentlink1description=Datasheet, componentlink1url=http://www.vishay.com/docs/20065/rcse3.pdf, componentlink2description="DigiKey Link", componentlink2url=https://www.digikey.com/en/products/detail/vishay-dale/RCS06030000Z0EC/10059623, Composition="Thick Film", Features="Automotive AEC-Q200, Pulse Withstanding", Height - Seated (Max)="0.020\" (0.50mm)", lastupdated="09/02/2024 20:42:16", Lifecycle Status=Active, Minimum Order=1, Number of Terminations=2, Package / Case="0603 (1608 Metric)", packaging=TapeAndReel, Part Number=RCS06030000Z0EC, Part Status=Active, partid=23936, price=0.01, Resistance="0 Ohms", series="RCS e3", Size / Dimension="0.061\" L x 0.033\" W (1.55mm x 0.85mm)", Supplier 1=DigiKey
R5: library part CRGP0603F3K3, "RES 3.3K OHM 1% 1/4W 0603", Device Package="0603 (1608 Metric)", manufacturer="TE Connectivity Passive Product", Operating Temperature="-55°C ~ 155°C", Power (Watts)="0.25W, 1/4W", Supplier Device Package=0603, Supplier Part Number 1=A130422CT-ND, Temperature Coefficient=±100ppm/°C, Tolerance=±1%, componentlink1description=Datasheet, componentlink1url=https://www.te.com/commerce/DocumentDelivery/DDEController?Action=srchrtrv&DocNm=9-1773463-9&DocType=DS&DocLang=English, componentlink2description="DigiKey Link", componentlink2url=https://www.digikey.com/en/products/detail/te-connectivity-passive-product/CRGP0603F3K3/8577024, Composition="Thick Film", Features="Pulse Withstanding", Height - Seated (Max)="0.022\" (0.55mm)", lastupdated="09/02/2024 20:43:36", Lifecycle Status=Active, Minimum Order=1, Number of Terminations=2, Package / Case="0603 (1608 Metric)", packaging=TapeAndReel, Part Number=CRGP0603F3K3, Part Status=Active, partid=5037, price=0.02, Resistance="3.3 kOhms", series=CRGP, Size / Dimension="0.063\" L x 0.031\" W (1.60mm x 0.80mm)", Supplier 1=DigiKey
R6: library part CPF0603F5K9C1, "RES SMD 5.9K OHM 1% 1/16W 0603", Device Package="0603 (1608 Metric)", manufacturer="TE Connectivity Passive Product", Operating Temperature="-55°C ~ 155°C", Power (Watts)="0.063W, 1/16W", Supplier Device Package=0603, Supplier Part Number 1=A102299CT-ND, Temperature Coefficient=±50ppm/°C, Tolerance=±1%, componentlink1description=Datasheet, componentlink1url=https://www.te.com/commerce/DocumentDelivery/DDEController?Action=srchrtrv&DocNm=1773200&DocType=DS&DocLang=English, componentlink2description="DigiKey Link", componentlink2url=https://www.digikey.com/en/products/detail/te-connectivity-passive-product/CPF0603F5K9C1/2384526, Composition="Thin Film", Height - Seated (Max)="0.022\" (0.55mm)", lastupdated="09/02/2024 20:43:28", Lifecycle Status=Active, Minimum Order=1, Number of Terminations=2, Package / Case="0603 (1608 Metric)", packaging=TapeAndReel, Part Number=CPF0603F5K9C1, Part Status=Active, partid=7049, price=0.02, Resistance="5.9 kOhms", series="CPF, Neohm", Size / Dimension="0.061\" L x 0.031\" W (1.55mm x 0.80mm)", Supplier 1=DigiKey
R9 R10: library part ERJ-3EKF22R0V, "RES SMD 22 OHM 1% 1/10W 0603", Device Package="0603 (1608 Metric)", manufacturer="Panasonic Electronic Components", Operating Temperature="-55°C ~ 155°C", Power (Watts)="0.1W, 1/10W", Ratings=AEC-Q200, Supplier Device Package=0603, Supplier Part Number 1=P22.0HCT-ND, Temperature Coefficient=±100ppm/°C, Tolerance=±1%, componentlink1description=Datasheet, componentlink1url=https://industrial.panasonic.com/cdbs/www-data/pdf/RDA0000/AOA0000C304.pdf, componentlink2description="DigiKey Link", componentlink2url=https://www.digikey.com/en/products/detail/panasonic-electronic-components/ERJ-3EKF22R0V/1746340, Composition="Thick Film", Features="Automotive AEC-Q200", Height - Seated (Max)="0.022\" (0.55mm)", lastupdated="09/02/2024 20:43:34", Lifecycle Status=Active, Minimum Order=1, Number of Terminations=2, Package / Case="0603 (1608 Metric)", packaging=TapeAndReel, Part Number=ERJ-3EKF22R0V, Part Status=Active, partid=5655, price=0.01, Resistance="22 Ohms", series=ERJ-3EK, Size / Dimension="0.063\" L x 0.031\" W (1.60mm x 0.80mm)", Supplier 1=DigiKey
R12: library part CPF0603B1K0E, "RES SMD 1K OHM 0.1% 1/16W 0603", Device Package="0603 (1608 Metric)", manufacturer="TE Connectivity Passive Product", Operating Temperature="-55°C ~ 155°C", Power (Watts)="0.063W, 1/16W", Supplier Device Package=0603, Supplier Part Number 1=A119887CT-ND, Temperature Coefficient=±25ppm/°C, Tolerance=±0.1%, componentlink1description=Datasheet, componentlink1url=https://www.te.com/commerce/DocumentDelivery/DDEController?Action=srchrtrv&DocNm=1773200&DocType=DS&DocLang=English, componentlink2description="DigiKey Link", componentlink2url=https://www.digikey.com/en/products/detail/te-connectivity-passive-product/CPF0603B1K0E/2390473, Composition="Thin Film", Height - Seated (Max)="0.022\" (0.55mm)", lastupdated="09/02/2024 20:43:37", Lifecycle Status=Active, Minimum Order=1, Number of Terminations=2, Package / Case="0603 (1608 Metric)", packaging=TapeAndReel, Part Number=CPF0603B1K0E, Part Status=Active, partid=4877, price=0.09, Resistance="1 kOhms", series="CPF, Neohm", Size / Dimension="0.061\" L x 0.031\" W (1.55mm x 0.80mm)", Supplier 1=DigiKey
R14: library part ERJ-3GEYJ3R9V, "RES SMD 3.9 OHM 5% 1/10W 0603", Device Package="0603 (1608 Metric)", manufacturer="Panasonic Electronic Components", Operating Temperature="-55°C ~ 155°C", Power (Watts)="0.1W, 1/10W", Ratings=AEC-Q200, Supplier Device Package=0603, Supplier Part Number 1=P3.9GCT-ND, Temperature Coefficient="-100/ +600ppm/°C", Tolerance=±5%, componentlink1description=Datasheet, componentlink1url=http://industrial.panasonic.com/www-cgi/jvcr13pz.cgi?E+PZ+3+AOA0001+ERJ3GEYJ3R9V+7+WW, componentlink2description="DigiKey Link", componentlink2url=https://www.digikey.com/en/products/detail/panasonic-electronic-components/ERJ-3GEYJ3R9V/282125, Composition="Thick Film", Features="Automotive AEC-Q200", Height - Seated (Max)="0.022\" (0.55mm)", lastupdated="09/02/2024 20:43:05", Lifecycle Status=Active, Minimum Order=1, Number of Terminations=2, Package / Case="0603 (1608 Metric)", packaging=TapeAndReel, Part Number=ERJ-3GEYJ3R9V, Part Status=Active, partid=12836, price=0.01, Resistance="3.9 Ohms", series=ERJ-3G, Size / Dimension="0.063\" L x 0.031\" W (1.60mm x 0.80mm)", Supplier 1=DigiKey
R15: library part RNCS0603BKE100R, "RES 100 OHM 0.1% 1/16W 0603", Device Package="0603 (1608 Metric)", manufacturer="Stackpole Electronics Inc", Operating Temperature="-55°C ~ 155°C", Power (Watts)="0.063W, 1/16W", Ratings=AEC-Q200, Supplier Device Package=0603, Supplier Part Number 1=RNCS0603BKE100RCT-ND, Temperature Coefficient=±25ppm/°C, Tolerance=±0.1%, componentlink1description=Datasheet, componentlink1url=https://www.seielect.com/catalog/sei-rncs_rnch.pdf, componentlink2description="DigiKey Link", componentlink2url=https://www.digikey.com/en/products/detail/stackpole-electronics-inc/RNCS0603BKE100R/1799988, Composition="Thin Film", Features="Anti-Corrosive, Automotive AEC-Q200, Moisture Resistant", Height - Seated (Max)="0.022\" (0.55mm)", lastupdated="09/02/2024 20:43:37", Lifecycle Status=Active, Minimum Order=1, Number of Terminations=2, Package / Case="0603 (1608 Metric)", packaging=TapeAndReel, Part Number=RNCS0603BKE100R, Part Status=Active, partid=4839, price=0.06, Resistance="100 Ohms", series=RNCS, Size / Dimension="0.061\" L x 0.031\" W (1.55mm x 0.80mm)", Supplier 1=DigiKey
R16: library part RNCS0603BKE100K, "RES 100K OHM 0.1% 1/16W 0603", Device Package="0603 (1608 Metric)", manufacturer="Stackpole Electronics Inc", Operating Temperature="-55°C ~ 155°C", Power (Watts)="0.063W, 1/16W", Ratings=AEC-Q200, Supplier Device Package=0603, Supplier Part Number 1=RNCS0603BKE100KCT-ND, Temperature Coefficient=±25ppm/°C, Tolerance=±0.1%, componentlink1description=Datasheet, componentlink1url=https://www.seielect.com/catalog/sei-rncs_rnch.pdf, componentlink2description="DigiKey Link", componentlink2url=https://www.digikey.com/en/products/detail/stackpole-electronics-inc/RNCS0603BKE100K/1708835, Composition="Thin Film", Features="Anti-Corrosive, Automotive AEC-Q200, Moisture Resistant", Height - Seated (Max)="0.022\" (0.55mm)", lastupdated="09/02/2024 20:43:37", Lifecycle Status=Active, Minimum Order=1, Number of Terminations=2, Package / Case="0603 (1608 Metric)", packaging=TapeAndReel, Part Number=RNCS0603BKE100K, Part Status=Active, partid=4849, price=0.06, Resistance="100 kOhms", series=RNCS, Size / Dimension="0.061\" L x 0.031\" W (1.55mm x 0.80mm)", Supplier 1=DigiKey
S1: "Switch", Manufacturer_Name="Same Sky", Mouser Part Number=179-TS046643BK100SMT, Arrow Part Number=TS04-66-43-BK-100-SMT, Arrow Price/Stock=https://www.arrow.com/en/products/ts04-66-43-bk-100-smt/cui-devices?region=nac, Datasheet Link=https://www.sameskydevices.com/product/resource/ts04.pdf, Height=4.5mm, Manufacturer_Part_Number=TS04-66-43-BK-100-SMT, Mouser Price/Stock=https://www.mouser.co.uk/ProductDetail/Same-Sky/TS04-66-43-BK-100-SMT?qs=A6eO%252BMLsxmQLIFa%2FCOIqWw%3D%3D
SW1: "Slide Switch SPDT Surface Mount, Right Angle", Package=None, Availability="In Stock", Check_prices=https://www.snapeda.com/parts/PCM12SMTR/C%2526K/view-part/?ref=eda, MF=C&K, MP=PCM12SMTR, price=None, Purchase-URL=https://pricing.snapeda.com/search/part/PCM12SMTR/?ref=eda, SnapEDA_Link=https://www.snapeda.com/parts/PCM12SMTR/C%2526K/view-part/?ref=snap
TP_3V3 TP_Boot TP_CHG TP_GATE TP_STUS: library part "Test Point", "Test point 1.5mm"
TP_EN: "Test point 1.5mm"

## Free pads (board coordinates)
  rrect50% 2.5x2.5 hole 1 square: 5(102.108,98.806) 6(110.871,98.806)
  round 0.7 hole 0.3: 7(76.962,98.806) 7(77.089,97.155) 7(77.343,90.17) 7(78.994,95.758) 7(79.375,90.297) 7(79.502,94.615) 7(80.33,83.886) 7(80.518,90.297) 7(81.534,88.519) 7(83.908,93.787) 7(83.908,95.565) 7(83.908,97.343) 7(84.963,88.392) 7(85.471,81.026) 7(87.122,82.423) 7(88.519,78.994) 7(88.646,86.36) 7(89.154,82.55) 7(90.17,75.946) 7(90.551,81.915) 7(91.22,70.265) 7(91.261,72.973) 7(91.821,93.726) 7(91.821,95.504) 7(91.821,97.155) 7(92.837,78.867) 7(93.853,89.027) 7(93.98,79.502) 7(94.869,73.66) 7(95.504,99.949) 7(96.393,73.66) 7(96.774,95.25) 7(97.282,84.074) 7(97.957,80.772) 7(98.254,92.793) 7(100.33,91.186) 7(101.346,73.914) 7(101.727,73.025) 7(101.981,89.916) 7(102.235,78.613) 7(102.743,73.406) 7(102.997,77.343) 7(103.251,79.248) 7(104.267,72.263) 7(105.644,70.759) 7(105.791,79.121) 7(107.823,76.581) 7(109.22,70.993) 7(109.474,80.01) 7(109.601,78.867) 7(110.236,89.027) 7(110.871,86.36) 7(110.871,90.043) 7(112.014,72.136) 7(112.615,82.804) 7(112.776,79.502) 7(112.776,91.186) 7(115.189,79.502) 7(115.316,90.932) 7(115.443,83.439) 7(117.094,92.456) 7(119.253,81.788) 7(121.031,81.661) 7(121.285,92.583) 8(88.519,88.519) 9(82.931,87.63)
  round 1.5 hole 0.7: 12(107.95,83.312) 12(114.554,89.535)

## Nets (pads, with @x,y where several pads share a name; then routed paths per layer and width w, separated by ;. In a path a pad name is that pad's centre, name@x,y a point inside that pad or via, vN(x,y) a via of type N, cw(c..) or ccw(c..) an arc to the next point about the centre after c; other vN are vias at no path point)
3V3: C3.2 C4.2 C6.2 C7.2 C9.2 C10.1 IC3.5 IC4.3 IC5.5 IC5.8 pad.7@77.343,90.17 pad.7@78.994,95.758 pad.7@90.17,75.946 pad.7@97.282,84.074 pad.7@98.254,92.793 R7.2 R8.2 R11.1 R13.1 R14.2 TP_3V3.3 TP_3V3.4 | length 109.6
  Top Layer w0.254: pad.7@77.343,90.17 77.343,91.552 R7.2 ; pad.7@78.994,95.758 79.542,96.306 C6.2 80.391,97.155 80.912,97.676 IC4.3 ; R14.2 86.726,74.056 87.503,73.279 87.503,71.12 89.281,69.342 92.329,69.342 92.71,69.723 92.71,75.577 TP_3V3.4@93.079,75.946 ; pad.7@90.17,75.946 90.291,75.946 90.545,76.2 TP_3V3.4@92.075,76.2 ; IC5.5 92.321,80.472 92.321,80.002 92.075,79.756 91.44,79.756 91.226,79.542 C10.1 91.059,78.446 91.059,77.216 TP_3V3.4@92.075,76.2 ; IC5.8@93.98,80.631 94.017,80.668 94.442,80.668 94.546,80.772 C9.2 95.377,79.375 94.107,78.105 93.599,78.105 92.71,77.216 TP_3V3.4 TP_3V3.4@92.075,76.2 ; R11.1 97.282,84.074 97.282,85.087 96.266,86.103 96.266,86.995 96.012,87.249 R8.2 ; C3.2 96.673,76.139 IC3.5 ; pad.7@98.254,92.793 98.298,92.837 R13.1
  Top Layer w0.5: C6.2 C7.2
  PWR w0.254: pad.7@78.994,95.758 77.978,95.758 76.454,94.234 76.454,90.551 76.835,90.17 77.343,90.17 77.343,78.232 78.359,77.216 88.138,77.216 89.408,75.946 90.17,75.946 90.17,78.983 89.874,79.279 89.874,82.655 90.023,82.804 96.266,82.804 97.282,84.074 98.425,84.074 99.314,84.963 99.314,91.821 pad.7@98.254,92.793
EN: IC3.3 pad.7@101.346,73.914 pad.7@102.235,78.613 SW1.2 | length 10.6
  Top Layer w0.254: SW1.2 98.806,72.223 98.806,73.152 98.987,73.333 100.765,73.333 pad.7@101.346,73.914 ; IC3.3 101.173,78.039 101.346,78.212 101.346,78.464 101.495,78.613 pad.7@102.235,78.613
  Bottom Layer w0.254: pad.7@101.346,73.914 101.346,74.676 102.235,75.565 pad.7@102.235,78.613
GND: C1.1 C2.1 C2x.2 C3.1 C4.1 C5.2 C6.1 C7.1 C8.1 C9.1 C10.2 D1.2 IC1.2 IC2.4 IC2.5 IC2.8 IC2.17 IC3.2 IC4.1 IC4.2 IC4.11 IC4.14 IC4.36 IC4.37 IC4.38 IC4.39 IC4.40 IC4.41 IC4.42 IC4.43 IC4.44 IC4.45 IC4.46 IC4.47 IC4.48 IC4.49 IC4.50 IC4.51 IC4.52 IC4.53 IC4.54 IC4.55 IC4.56 IC4.57 IC4.58 IC4.59 IC4.60 IC4.61 IC5.2 IC5.3 IC5.6 IC5.7 J1.A1_B12 J1.B1_A12 J1.SH1 J1.SH2 J1.SH3 J1.SH4 J_BAT.2 pad.6 pad.7@76.962,98.806 pad.7@77.089,97.155 pad.7@79.375,90.297 pad.7@80.33,83.886 pad.7@80.518,90.297 pad.7@81.534,88.519 pad.7@83.908,93.787 pad.7@83.908,95.565 pad.7@83.908,97.343 pad.7@84.963,88.392 pad.7@87.122,82.423 pad.7@88.519,78.994 pad.7@89.154,82.55 pad.7@90.551,81.915 pad.7@91.22,70.265 pad.7@91.261,72.973 pad.7@91.821,93.726 pad.7@91.821,95.504 pad.7@91.821,97.155 pad.7@92.837,78.867 pad.7@93.98,79.502 pad.7@93.853,89.027 pad.7@94.869,73.66 pad.7@95.504,99.949 pad.7@96.393,73.66 pad.7@97.957,80.772 pad.7@100.33,91.186 pad.7@101.727,73.025 pad.7@101.981,89.916 pad.7@102.743,73.406 pad.7@102.997,77.343 pad.7@103.251,79.248 pad.7@104.267,72.263 pad.7@105.644,70.759 pad.7@105.791,79.121 pad.7@107.823,76.581 pad.7@109.22,70.993 pad.7@109.474,80.01 pad.7@109.601,78.867 pad.7@110.236,89.027 pad.7@110.871,86.36 pad.7@110.871,90.043 pad.7@112.014,72.136 pad.7@112.615,82.804 pad.7@112.776,79.502 pad.7@112.776,91.186 pad.7@115.189,79.502 pad.7@115.316,90.932 pad.7@115.443,83.439 pad.7@117.094,92.456 pad.7@119.253,81.788 pad.7@121.031,81.661 pad.7@121.285,92.583 Q1.2 R1.2 R2.1 R3.1 R5.2 R6.2 R16.1 S1.2 S1.4 SW1.3 | length 78.3
  Top Layer w0.254: pad.7@76.962,98.806 C7.1 ; pad.7@77.089,97.155 C6.1 ; C8.1 79.121,90.678 pad.7@79.375,90.297 ; Q1.2 pad.7@80.33,83.886 ; pad.7@80.518,90.297 81.425,91.204 81.711,91.204 81.81,91.303 IC4.11@81.81,91.313 ; pad.7@81.534,88.519 81.807,88.792 81.807,90.199 IC4.52 ; IC4.14 84.684,89.535 84.557,89.408 84.557,88.798 84.709,88.646 ; R16.1 86.741,82.804 pad.7@87.122,82.423 ; IC4.56 IC4.58 ; IC4.55 IC4.49 87.91,95.25 89.833,95.25 IC4.59 ; IC4.54 IC4.61 IC4.60 ; pad.7@88.519,78.994 88.9,78.613 C10.2 ; pad.7@89.154,82.55 90.297,81.153 90.932,81.153 90.94,81.145 IC5.3 ; pad.7@90.551,81.915 90.948,81.645 IC5.2 ; pad.7@91.22,70.265 91.254,70.426 D1.2 91.254,72.966 pad.7@91.261,72.973 ; pad.7@92.837,78.867 92.844,79.559 IC5.6 ; IC5.7 93.344,79.63 93.472,79.502 pad.7@93.98,79.502 ; IC4.51 93.78,90.272 pad.7@93.853,89.027 ; pad.7@94.869,73.66 C4.1 ; pad.7@96.393,73.66 96.647,73.914 C3.1 ; C9.1 pad.7@97.957,80.772 ; SW1.3 100.937,72.108 101.727,72.898 pad.7@101.727,73.025 ; pad.7@100.33,91.186 S1.2 pad.7@101.981,90.043 ; IC3.2 102.489,77.089 pad.7@102.997,77.343 ; pad.7@102.743,73.406 C5.2 ; pad.7@103.251,79.248 103.336,79.163 103.336,78.986 104.344,77.978 C2.1 ; pad.7@104.267,72.263 104.775,72.771 R5.2 ; C2x.2 105.624,70.906 pad.7@105.644,70.759 ; pad.7@105.791,79.121 106.045,79 106.49,78.556 106.49,78.422 106.807,78.105 107.159,78.105 107.162,78.102 IC2.8 ; IC2.5 108.665,78.015 108.665,79.201 pad.7@109.474,80.01 ; R6.2 108.712,71.374 108.966,71.12 pad.7@109.22,70.993 ; IC2.4 109.647,77.327 109.982,77.662 109.982,78.486 pad.7@109.601,78.867 ; IC1.2 110.617,86.106 pad.7@110.871,86.36 ; pad.7@110.236,89.027 R2.1 ; R3.1 110.759,72.136 pad.7@111.887,72.136 ; pad.7@110.871,90.043 111.081,90.253 S1.4 pad.7@112.776,91.186 ; R1.2 111.999,83.2 pad.7@112.615,82.804 ; pad.7@115.316,90.805 115.322,90.805 115.515,90.612 115.515,90.606 115.723,90.398 116.454,90.398 J1.B1_A12 ; pad.7@115.443,83.439 115.672,83.922 J1.A1_B12 ; pad.7@117.094,92.456 117.105,92.445 J1.SH2 ; J1.SH1 117.096,82.802 117.221,82.677 118.618,82.677 118.999,82.296 pad.7@119.253,81.788 ; pad.7@121.031,81.661 121.285,81.915 J1.SH3 ; J1.SH4 pad.7@121.285,92.583
HAPTIC+: D2.1 j2.2 R14.1 | length 14.3
  Top Layer w0.254: D2.1 80.133,77.851 80.01,77.728 j2.2 80.01,71.247 80.391,70.866 85.09,70.866 85.71,71.486 R14.1@85.71,72.771
  Bottom Layer w0.254: j2.2@79.883,72.898 j2.2
HAPTIC_PWM: IC4.13 R15.1 | length 6.7
  Top Layer w0.254: IC4.13 83.884,89.535 83.757,89.408 83.757,88.582 85.867,86.472 R15.1
HAPTIC_SW: D2.2 j2.1 Q1.3 | length 7.9
  Top Layer w0.254: Q1.3 81.28,79.248 81.915,78.613 82.296,78.613 82.55,78.359 82.55,77.87 D2.2 82.55,77.832 j2.1
IMU_CS: IC4.21 IC5.12 R11.2 | length 9.5
  Top Layer w0.254: IC4.21 90.284,90.411 90.297,90.424 90.297,89.167 90.157,89.027 90.157,88.151 93.345,84.963 R11.2@93.345,84.201 ; IC5.12 93.344,83.184 93.472,83.312 93.472,84.044 R11.2
IMU_INT1: IC4.16 IC5.4 | length 13.2
  Top Layer w0.254: IC4.16 86.357,90.303 86.357,90.046 86.36,90.043 86.36,89.45 86.157,89.247 86.157,88.722 86.995,87.884 86.995,83.566 89.916,80.645 IC5.4
IMU_MISO: IC4.19 IC5.1 pad.7@88.646,86.36 pad.8 | length 9.5
  Top Layer w0.254: pad.8 88.519,89.154 88.684,89.319 IC4.19 ; pad.7@88.646,86.36 91.059,83.693 91.059,83.311 91.694,82.676 IC5.1
  Bottom Layer w0.254: pad.8 88.582,88.456 88.582,86.423 pad.7@88.646,86.36
IMU_MOSI: IC4.18 IC5.14 | length 10
  Top Layer w0.254: IC4.18 87.884,89.662 87.757,89.535 87.757,88.265 92.075,83.947 92.075,83.178 92.344,82.909 IC5.14
IMU_SCK: IC4.20 IC5.13 | length 9.5
  Top Layer w0.254: IC4.20 89.484,87.808 92.587,84.705 92.587,83.308 92.844,83.051 IC5.13
LED: IC4.6 pad.7@79.502,94.615 pad.7@85.471,81.026 R12.1 | length 27.2
  Top Layer w0.254: pad.7@79.502,94.615 80.163,95.276 IC4.6 ; pad.7@85.471,80.899 85.471,80.518 89.154,76.835 R12.1
  Bottom Layer w0.254: pad.7@79.502,94.615 78.867,94.336 78.698,94.167 78.698,90.017 85.471,83.244 pad.7@85.471,81.026
NetC8_2: C8.2 IC4.8 R7.1 TP_EN.3 TP_EN.4 | length 6.7
  Top Layer w0.254: TP_EN.3 R7.1@77.455,92.964 ; R7.1 79.106,92.979 C8.2 80.137,92.964 80.849,93.676 81.738,93.676 81.788,93.726 81.838,93.676 IC4.8
NetC10_2: 
NetD1_1: D1.1 R12.2 | length 1.9
  Top Layer w0.254: D1.1 R12.2
NetIC2_1: IC2.1 R3.2 | length 3.4
  Top Layer w0.254: IC2.1 109.35,75.824 109.977,75.824 110.744,75.057 R3.2
NetIC2_6: IC2.6 R4.2 | length 2.3
  Top Layer w0.254: R4.2 107.95,79.502 108.162,79.29 IC2.6
NetIC2_7: IC2.7 TP_STUS.3 TP_STUS.4 | length 3.8
  Top Layer w0.254: TP_STUS.4 106.045,80.899 106.045,80.01 107.188,78.867 107.315,78.867 107.659,78.523 107.659,78.015 IC2.7
NetIC2_9: IC2.9 TP_CHG.3 TP_CHG.4 | length 4.9
  Top Layer w0.254: TP_CHG.4 103.886,79.905 106.334,77.457 106.334,77.33 IC2.9
NetIC2_12: IC2.12 R5.1 | length 2.4
  Top Layer w0.254: R5.1 104.954,75.012 104.954,75.49 105.291,75.827 IC2.12
NetIC2_16: IC2.16 R6.1 | length 1.6
  Top Layer w0.254: IC2.16 108.662,73.598 R6.1
NetIC4_23: IC4.23 R8.1 TP_Boot.3 TP_Boot.4 | length 6.8
  Top Layer w0.254: IC4.23 91.884,89.154 91.757,89.027 91.757,87.821 92.329,87.249 R8.1 93.726,86.36 TP_Boot.4
NetIC4_26: IC4.26 R9.2 | length 6.8
  Top Layer w0.254: IC4.26 94.741,92.076 97.79,89.027 R9.2@97.79,87.54
NetIC4_27: IC4.27 R10.2 | length 8.3
  Top Layer w0.254: IC4.27 96.1,92.876 99.695,89.281 R10.2
NetJ1_A5: J1.A5 R1.1 | length 4.3
  Top Layer w0.254: R1.1@113.376,84.455 113.376,85.436 113.812,85.872 J1.A5
NetJ1_B5: J1.B5 R2.2 | length 4.3
  Top Layer w0.254: R2.2 113.284,89.027 113.853,88.458 115,88.458 115.414,88.872 J1.B5
NetQ1_1: Q1.1 R15.2 R16.2 TP_GATE.3 TP_GATE.4 | length 6
  Top Layer w0.254: TP_GATE.4 Q1.1 84.42,82.657 R16.2 R15.2
SET_BTN: IC4.12 pad.5 pad.7@96.774,95.25 pad.9 R13.2 S1.1 S1.3 | length 37.9
  Top Layer w0.254: pad.9 82.949,89.154 83.084,89.288 IC4.12 ; pad.7@96.774,95.25 98.156,95.25 R13.2 ; S1.1 S1.1@102.108,95.813
  Top Layer w0.5: R13.2 99.583,95.392 99.877,95.686 S1.1 S1.3 ; S1.1@102.108,95.813 pad.5
  Bottom Layer w0.254: pad.9 85.344,87.63 88.646,90.932 93.218,90.932 96.774,94.488 pad.7@96.774,95.25
USB_DN: IC1.1 J1.A7 J1.B7 | length 10.3
  Top Layer w0.254: IC1.1 109.916,85.156 109.982,85.09 110.054,85.162 110.689,85.162 111.922,86.395 J1.B7@116.586,86.395 ; J1.B7 117.36,86.372 117.687,86.699 117.687,86.91 117.248,87.349 116.553,87.349 J1.A7
USB_DN-: IC1.6 R9.1 | length 9.9
  Top Layer w0.254: R9.1 105.283,86.218 106.345,85.156 IC1.6
USB_DP: IC1.3 J1.A6 J1.B6 | length 8.9
  Top Layer w0.254: IC1.3 110.551,87.056 111.383,87.888 114.681,87.888 114.697,87.872 J1.B6 ; 115.57,87.769 115.57,87.122 115.797,86.895 116.507,86.895 J1.A6
USB_DP+: IC1.4 R10.1 | length 7.5
  Top Layer w0.254: R10.1 99.746,87.056 IC1.4
USB_VBUS: C2x.1 IC1.5 IC2.13 J1.A4_B9 J1.B4_A9 pad.12 R4.1 TP_VBUS.3 TP_VBUS.4 | length 58.9
  Top Layer w0.254: 107.159,74.313 IC2.13@107.159,75.139 ; pad.12@107.95,83.312 pad.12@108.031,83.393 ; pad.12@114.935,89.535 pad.12@114.948,89.522 ; J1.A4_B9 116.692,84.884 117.904,84.884 118.999,85.979 118.999,88.392 118.031,89.36 117.335,89.36 117.304,89.391 116.661,89.391 J1.B4_A9
  Top Layer w0.3: 106.974,74.128 107.159,74.313
  Top Layer w0.5: 106.974,74.128 C2x.1 106.974,70.699 107.95,69.723 113.792,69.723 115.824,69.723 117.094,70.993 117.094,80.391 116.078,81.407 115.893,81.407 114.427,82.873 114.427,83.82 115.329,84.722 J1.A4_B9 ; IC1.5 107.95,86.106 108.258,85.798 108.258,84.67 108.031,84.443 pad.12@108.031,83.393 ; R4.1 pad.12@107.95,83.312 ; pad.12@114.948,89.522 J1.B4_A9
  Bottom Layer w0.5: pad.12@107.696,83.312 107.95,83.312 111.492,83.312 114.554,86.374 pad.12@114.554,89.535
VBAT: C1.2 IC2.2 IC2.3 J_BAT.1 | length 6.5
  Top Layer w0.254: IC2.2 IC2.3 110.926,76.827 C1.2
  Top Layer w0.5: C1.2 110.998,75.936 111.147,75.787 J_BAT.1
VSYS: C2.2 C5.1 IC2.10 IC2.11 IC3.1 SW1.1 | length 13.8
  Top Layer w0.254: SW1.1 95.719,72.136 96.266,72.136 97.917,73.787 99.695,73.787 101.072,75.164 IC3.1 ; C5.1@102.717,76.139 C5.1 ; C2.2@104.474,76.581 104.521,76.628 105.457,76.628 105.656,76.827 IC2.10 IC2.11
  Top Layer w0.5: IC3.1 C5.1@102.717,76.139 ; C5.1 103.545,76.113 104.013,76.581 C2.2@104.474,76.581
pads on no net: IC2.14 IC2.15 IC3.4 IC4.4 IC4.5 IC4.7 IC4.9 IC4.10 IC4.15 IC4.17 IC4.22 IC4.24 IC4.25 IC4.28 IC4.29 IC4.30 IC4.31 IC4.32 IC4.33 IC4.34 IC4.35 IC5.9 IC5.10 IC5.11 J1. J1.A8 J1.B8 J_BAT.S1 J_BAT.S2 SW1. SW1.S1 SW1.S2 SW1.S3 SW1.S4

## Polygon pours and split planes (outlines as drawn)
GND on Top Layer "GND_L01_P009" (solid, pour order 9): 76.835,101.092 120.137,101.092 121.64,100.264 122.461,99.301 122.982,97.725 122.936,71.501 120.904,68.834 120.05,68.446 76.31,68.705 74.996,69.925 73.914,71.755 73.914,72.136 74.168,97.924 75.085,99.774 76.581,100.965
GND on Top Layer "GND_L01_P003" (solid, pour order 3): 80.645,100.646 80.645,98.171 83.185,98.171 83.185,91.821 92.71,91.694 92.71,98.806 92.964,99.06 96.774,99.06 96.774,100.784
GND on Top Layer "GND_L01_P002" (solid, pour order 2): 110.236,78.867 110.236,78.74 110.236,77.47 110.363,77.343 116.332,77.343 116.332,80.137 110.236,80.137
3V3 on Top Layer "3V3_L01_P001" (solid, pour order 1): 90.805,77.089 99.695,77.089 99.695,75.311 90.805,75.311
GND on GND "GND_L02_P004" (solid, pour order 4): 76.835,101.092 120.137,101.092 121.64,100.264 122.461,99.301 122.982,97.725 122.936,71.501 120.904,68.834 120.05,68.446 76.31,68.705 74.996,69.925 73.914,71.755 73.914,72.136 74.168,97.924 75.085,99.774 76.581,100.965
GND on Bottom Layer "GND_L04_P008" (solid, pour order 8): 76.835,101.092 120.137,101.092 121.64,100.264 122.461,99.301 122.982,97.725 122.936,71.501 120.904,68.834 120.05,68.446 76.31,68.705 74.996,69.925 73.914,71.755 73.914,72.136 74.168,97.924 75.085,99.774 76.581,100.965

## Silkscreen, mask and mechanical layers (free items; w line width, h text height)
Top Overlay:
  text "ESS Guidance -BOW module V1.0" at 113.157,97.663 h0.5
  text "SET" at 104.267,97.282 h1.52
  text "by RD" at 118.591,96.753 h0.4
  text "3v3" at 77.443,95.477 h0.3
  text "USB" at 117.879,92.352 h1
  text "ESP32" at 89.431,88.542 h0.8
  text "BOW  / <--" at 75.311,81.788 h1
  text "IMU" at 88.542,80.414 h0.8
  text "-" at 113.053,78.39 h1
  text "Haptic" at 74.826,76.617 h0.8
  text "+" at 112.926,73.262 h1
  text "BATT" at 117.292,70.864 h1
  text "+" at 77.62,70.341 h1
  text "-" at 84.478,70.135 h1
  text "ON" at 91.463,68.984 h1
  text "OFF" at 102.639,68.857 h1
Mechanical 1:
  the board outline again, w0.254